# Altium PCB PCB.PcbDoc (part 2 of 2)
Units mil, origin at the board's own origin, x right, y up, seen from the top; angles counter-clockwise.
Board outline 1968.5 x 1220.47 mil, 2 copper layers (Top Layer, Bottom Layer); 78 components, 60 nets, 294 pads, 70 vias.
Unrouted connection lines stored in the file: 2.
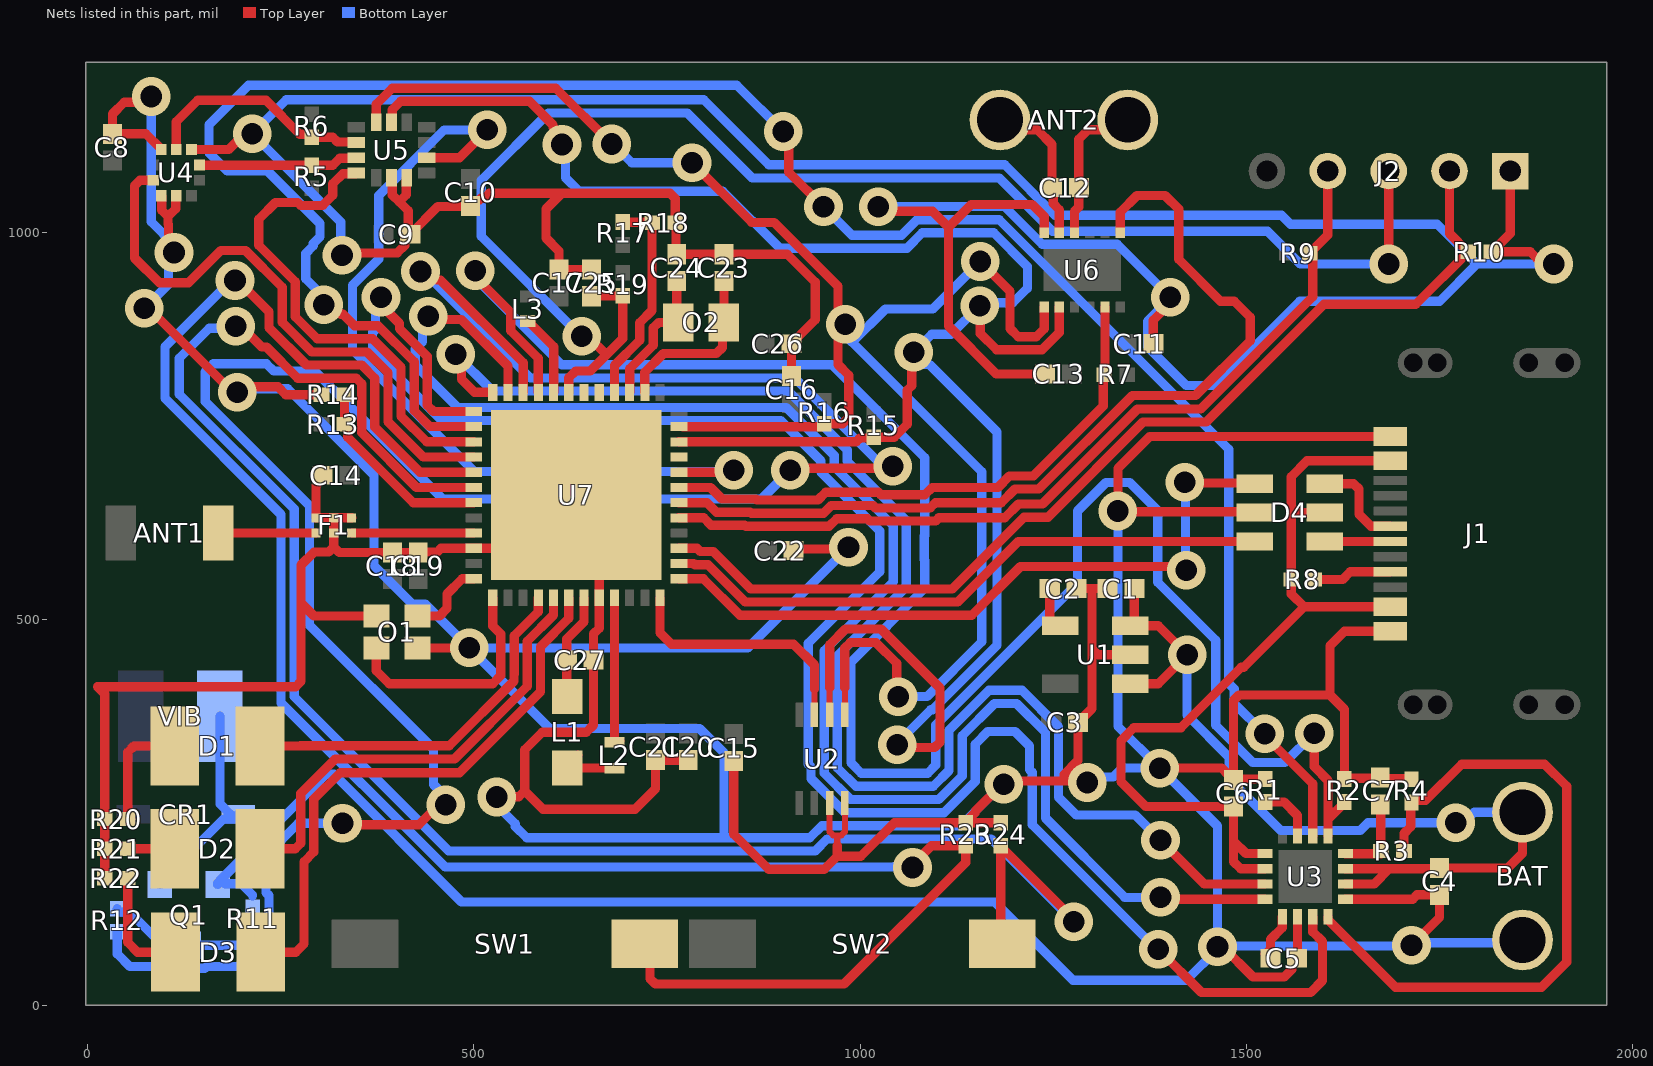
[diagram p2: the nets of this part, all layers, seen from the top]

## Via types
v1: diameter 50, hole 28, Top Layer to Bottom Layer, 70 vias

## Nets (pads, with @x,y where several pads share a name; then routed paths per layer and width w, separated by ;. In a path a pad name is that pad's centre, name@x,y a point inside that pad or via, vN(x,y) a via of type N, cw(c..) or ccw(c..) an arc to the next point about the centre after c; other vN are vias at no path point) (continued)
GND: BAT.2 C1.1 C2.1 C3.1 C4.1 C5.2 C6.2 C7.1 C8.1 C9.1 C10.1 C11.1 C13.2 C14.2 C15.1 C16.2 C17.1 C18.2 C19.1 C20.1 C21.2 C22.1 C23.2 C24.1 C25.1 C26.1 C27.2 D4.2 F1.A2 F1.B1 F1.B2 F1.B3 J1.A1-B12 J1.B1-A12 J2.1 O1.2 O1.4 Q1.2 R1.2 R2.2 R4.2 R10.1 R11.2 R14.2 R18.2 R20.2 R21.2 R22.2 R23.2 R24.2 U1.2 U2.3 U2.4 U3.6 U3.9 U4.3 U4.5 U4.8 U4.9 U5.6 U5.7 U6.6 U7.22 U7.32 U7.49 | length 15944.2
  Top Layer w5: BAT.2@1859.79,54.53 BAT.2@1859.79,70.28
  Top Layer w8: U2.3@960.64,272.61 960.64,224.67 965.32,219.98 970.48,219.98 ; 970.48,206.7 970.48,219.98 ; U2.4@980.34,272.61 980.34,228.37 980.31,224.67 975.63,219.98 970.48,219.98
  Top Layer w12: R22.2@22.5,164.37 R21.2@22.5,202.76 R20.2@22.5,241.14 22.5,402.95 13.05,412.4 269.55,412.4 276.57,419.43 276.57,520.67 ; v1(73.82,902.15) 79.43,902.15 188.28,793.31 v1(193.9,793.31) 201.17,800.58 246.67,800.58 256.89,790.35 R14.2@303.01,790.35 ; v1(82.68,1176.18) 75.41,1168.91 47.85,1168.91 32.48,1153.54 C8.1@32.48,1127.95 75.69,1127.95 95.47,1108.17 U4.5@95.47,1107.68 ; U4.8@95.47,1047.64 96.27,1046.84 96.27,1029.13 104.33,1021.06 ; v1(112.2,974.41) 104.93,981.68 104.93,1010.52 104.33,1011.12 104.33,1021.06 ; U4.9@115.16,1047.64 114.36,1046.84 114.36,1031.09 104.33,1021.06 ; U4.3@134.84,1107.68 183.02,1107.68 203.3,1127.95 v1(213.58,1127.95) ; C14.2@304.53,686.02 303.74,686.02 297.54,679.82 297.54,674.54 295.79,672.79 F1.B1@295.79,630.91 F1.B2@318.9,630.91 ; v1(329.5,970.7) 332.62,973.83 401.23,973.83 410.92,983.52 410.92,991.83 C9.1@417.13,998.03 ; F1.B3@342.01,630.91 F1.B2@318.9,630.91 ; O1.4@374.02,503.94 293.31,503.94 276.57,520.67 ; U5.6@393.7,1070.87 394.59,1069.98 394.59,1048.81 403.54,1039.86 ; U5.7@413.39,1070.87 412.59,1070.07 412.59,1048.91 403.54,1039.86 ; C9.1@415.17,999.99 415.17,1028.24 403.54,1039.86 ; C9.1@417.91,998.03 453.64,1033.76 495.08,1033.76 C10.1@496.06,1034.74 496.06,1035.53 502.27,1041.74 506.64,1041.74 509.3,1044.4 513.24,1044.4 520.02,1051.18 614.17,1051.18 ; O1.2@427.17,462.6 v1(494.09,462.6) ; v1(529.61,269.77) 529.91,270.07 558.45,270.07 565.94,277.56 ; C17.1@610.24,952.36 610.24,976.38 593.5,993.11 593.5,1030.51 614.17,1051.18 ; C17.1@610.73,951.87 652.07,951.87 C25.1@652.56,952.36 ; C20.1@777.56,317.32 C21.2@735.24,317.32 735.24,280.51 708.66,253.94 589.57,253.94 565.94,277.56 ; C15.1@836.61,316.34 836.61,221.46 881.89,176.18 953.74,176.18 970.48,192.92 ; C16.2@911.42,814.57 911.22,814.76 911.22,856.1 C26.1@911.02,856.3 911.81,856.3 918.02,862.5 918.02,863.29 941.93,887.2 941.93,936.02 905.91,972.05 C24.1@762.8,972.05 761.88,972.96 761.88,1011.88 R18.2@760.97,1012.8 760.97,1044.15 753.94,1051.18 614.17,1051.18 ; C22.1@913.98,588.58 916.15,590.75 982.87,590.75 v1(985.03,592.92) ; 970.48,206.7 970.48,192.92 ; v1(1023.62,1033.73) 1029.8,1027.56 1093.73,1027.56 1114.37,1006.92 ; R24.2@1182.09,236.5 R23.2@1136.81,236.5 ; v1(1185.89,286.24) 1183.87,286.24 1149.44,251.8 1149.44,249.97 1136.81,237.35 R23.2@1136.81,236.5 ; v1@1188.07,290.43 1262.71,290.43 ; U6.6@1238.19,1000 1238.19,1020.9 1222.64,1036.45 1143.9,1036.45 1114.37,1006.92 ; C13.2@1239.57,817.16 1176.37,817.16 1114.37,879.16 1114.37,1006.92 ; C2.1@1280.12,539.37 1300.2,539.37 ; v1(1293.89,288.39) 1291.84,290.43 1263.78,290.43 1263.78,298.67 1282.09,316.98 C3.1@1282.09,366.14 1282.87,366.14 1289.08,372.35 1289.08,373.13 1300.2,384.25 1300.2,461.61 ; C1.1@1320.28,539.37 1300.2,539.37 ; U1.2@1349.41,453.74 1308.07,453.74 1300.2,461.61 ; C11.1@1379.53,856.53 1379.53,886.73 1401.57,908.78 v1(1401.57,916.34) ; v1(1387.8,307.09) 1468.11,307.09 1476.28,298.92 1477.06,298.92 C6.2@1483.27,292.72 ; v1(1462.6,75.79) 1469.49,75.79 1508.46,36.82 1548.87,36.82 1558.56,46.51 1558.56,54.82 1564.76,61.02 C5.2@1565.55,61.02 1566.1,61.58 1566.1,114.67 U3.6@1566.2,114.76 ; C6.2@1494.09,292.03 1483.37,292.03 1483.37,394.55 1490.4,401.57 1608.27,401.57 ; C6.2@1494.09,293.05 R1.2@1524.47,293.05 ; D4.2@1510.83,637.8 1509.84,638.78 1334.65,638.78 v1(1333.66,639.76) 1333.66,694.88 1375.02,736.24 J1.B1-A12@1686,736.24 ; U3.9@1628.21,137.4 1715.16,137.4 1720.87,143.11 C4.1@1750,143.11 1750,114.17 v1(1713.58,77.76) ; J1.A1-B12@1686,484.24 1626.95,484.24 1608.27,465.55 1608.27,401.57 ; R4.2@1713.58,292.46 1712.37,293.67 1674.44,293.67 C7.1@1673.23,294.88 1672.31,293.97 1627.74,293.97 1626.83,294.88 1626.83,383.01 1608.27,401.57 ; J2.1@1841.54,1079.72 1841.54,999.02 1817.91,975.39 1867.21,975.39 v1@1875.83,966.78 ; BAT.2@1864.67,92.03 BAT.2@1873.03,83.66 ; 276.57,520.67 276.57,569.88 293.31,586.61 312.01,586.61 318.9,593.5 ; 318.9,593.5 326.18,586.22 C18.2@394.68,586.22 C19.1@428.15,586.22 428.54,586.61 452.76,586.61 457.68,591.54 U7.22@500,591.54 563.98,591.54 U7.49@632.87,660.43 662.4,630.91 U7.32@662.4,527.56 662.4,488.19 655.12,480.91 C27.2@655.12,446.85 655.12,362.8 645.67,353.35 588.58,353.35 565.94,330.71 565.94,277.56 ; 318.9,593.5 F1.A2@318.9,611.22 F1.B2@318.9,630.91 ; 970.48,192.92 1000.99,192.92 1044.57,236.5 R23.2@1136.81,236.5 ; 1300.2,461.61 1300.2,539.37
  Bottom Layer w12: v1(73.82,902.15) 104.93,933.27 104.93,967.14 v1(112.2,974.41) 112.2,984.65 82.68,1014.18 v1(82.68,1176.18) ; Q1.2@168.59,156.5 168.59,158.46 172.97,162.85 309.15,299.02 319.09,299.02 484.25,133.86 1174.21,133.86 1275.59,32.48 1422.24,32.48 1462.6,72.83 v1(1462.6,75.79) ; Q1.2@173.96,161.86 178.34,157.48 199.1,157.48 213.87,142.72 213.87,141.87 ; v1(193.9,793.31) 198.44,797.85 259.24,797.85 371.06,686.02 371.06,568.9 420.58,519.38 437.31,519.38 v1(494.09,462.6) ; v1(329.5,970.7) 327.83,972.36 327.83,1013.7 v1(213.58,1127.95) 257.53,1171.9 797.59,1171.9 881.76,1087.73 1187.29,1087.73 1252.39,1022.64 1545.28,1022.64 1557.09,1010.83 1746.77,1010.83 1798.09,959.51 ; v1(529.61,269.77) 529.61,259.48 553.85,235.24 553.85,231.58 568.63,216.8 823.83,216.8 ; v1(985.03,592.92) 854.71,462.6 v1(494.09,462.6) ; v1(1023.62,1033.73) 1187.16,1033.73 1235.92,984.97 1332.94,984.97 v1(1401.57,916.34) 1401.57,914.58 1372.05,885.05 1372.05,852.36 1422.24,802.17 1459.65,802.17 1568.9,911.42 1750,911.42 1798.09,959.51 ; v1(1185.89,286.24) 1183.87,286.24 1130.1,232.46 950.6,232.46 934.94,216.8 823.83,216.8 ; v1(1293.89,288.39) 1301.16,295.66 1327.79,295.66 1339.22,307.09 v1(1387.8,307.09) ; v1(1333.66,639.76) 1333.66,361.22 v1(1387.8,307.09) ; BAT.2@1857.28,84.65 1853.84,81.2 1717.03,81.2 v1(1713.58,77.76) 1712.6,76.77 1463.58,76.77 v1(1462.6,75.79) ; v1(1897.64,959.51) 1798.09,959.51 ; v1(494.09,462.6) 598.43,358.27 792.32,358.27 823.83,326.76 823.83,216.8 ; v1(1387.8,307.09) 1462.6,232.28 v1(1462.6,75.79)
NetANT1_1: ANT1.1 F1.A1 | length 126.5
  Top Layer w12: ANT1.1@169.29,611.22 F1.A1@295.79,611.22
NetANT2_1: ANT2.1 C12.1 U6.4 | length 196.9
  Top Layer w12: U6.4@1277.56,1000 1277.56,1027.79 1283.07,1033.3 C12.1@1283.07,1058.3 1283.07,1120.9 1295.3,1133.13 1333.69,1133.13 ANT2.1@1346.46,1145.9
NetANT2_2: ANT2.2 C12.2 U6.5 | length 198.5
  Top Layer w12: ANT2.2@1181.1,1145.9 1193.87,1133.13 1229.31,1133.13 1248.43,1114.01 C12.2@1248.43,1058.3 1250,1056.72 1250,1037.63 1257.87,1029.76 U6.5@1257.87,1000
NetC2_2: C2.2 U1.4 | length 58.2
  Top Layer w12: C2.2@1245.47,539.37 1245.47,496.95 1251.28,491.14 U1.4@1258.86,491.14
NetC5_1: C5.1 U3.5 | length 57.9
  Top Layer w12: C5.1@1524.27,66.54 1525.06,66.54 1531.26,72.74 1531.26,85.4 1546.42,100.55 1546.42,114.67 U3.5@1546.51,114.76
NetC7_2: C7.2 R3.1 U3.12 | length 106.6
  Top Layer w12: U3.12@1628.21,196.46 1628.3,196.36 R3.1@1674.03,196.36 ; C7.2@1673.23,260.24 1673.65,259.81 1673.65,200.23 R3.1@1674.07,199.8
NetC23_1: C23.1 O2.1 U7.2 | length 219.9
  Top Layer w12: U7.2@721.46,793.31 721.46,819.46 745.5,843.5 813.98,843.5 821.85,851.38 O2.1@821.85,877.95 ; O2.1@823.82,883.86 C23.1@823.82,937.4
NetC24_2: C24.2 O2.2 U7.3 | length 202
  Top Layer w10: O2.2@764.76,883.86 O2.2@778.94,898.03
  Top Layer w12: U7.3@701.77,793.31 701.77,823.82 732.28,854.33 732.28,876.83 739.31,883.86 O2.2@760.83,883.86 ; C24.2@762.8,937.4 762.8,885.83 O2.2@764.76,883.86
NetC25_2: C25.2 J2.3 R19.1 U7.7 | length 1913.3
  Top Layer w12: U7.7@623.03,793.31 623.13,793.4 623.13,812.1 631.89,820.87 650.74,820.87 671.82,841.95 ; v1(639.76,866.14) 647.64,866.14 671.82,841.95 ; C25.2@652.56,916.93 653.57,917.94 690.72,917.94 R19.1@690.94,918.17 ; R19.1@692.91,918.17 692.91,863.04 671.82,841.95 ; v1(1684.06,959.51) J2.3@1684.06,1079.72
  Bottom Layer w12: v1(639.76,866.14) 638.94,866.14 509.84,995.24 509.84,1067.91 596.83,1154.9 776.2,1154.9 860.37,1070.73 1180.25,1070.73 1249.02,1001.97 1527.27,1001.97 1569.73,959.51 v1(1684.06,959.51)
NetC27_1: C27.1 L1.2 U7.31 | length 153.6
  Top Layer w10: L1.2@621.06,399.61 L1.2@632.48,411.02
  Top Layer w12: L1.2@621.06,399.61 620.47,400.2 C27.1@620.47,446.85 620.47,474.26 642.72,496.51 U7.31@642.72,527.56
NetCR1_2: CR1.2 Q1.1 VIB.1 | length 272.7
  Bottom Layer w12: Q1.1@93.79,156.5 93.79,158.46 176.68,241.36 189.34,241.36 CR1.2@195.17,247.19 ; VIB.1@171.54,374.16 171.54,260.76 CR1.2@185.12,247.19
NetD1_1: D1.1 R20.1 | length 150.7
  Top Layer w12: R20.1@52.31,241.14 52.31,327.62 60.32,335.63 D1.1@113.19,335.63
NetD1_2: D1.2 U7.28 | length 484.4
  Top Layer w12: D1.2@223.43,335.63 275.31,335.63 275.58,335.9 468.21,335.9 552.17,419.86 552.17,428.15 552.43,428.42 552.43,478.35 583.57,509.48 583.57,527.46 U7.28@583.66,527.56
NetD2_1: D2.1 R21.1 | length 60.9
  Top Layer w12: R21.1@52.31,202.76 D2.1@113.19,202.76
NetD2_2: D2.2 U7.29 | length 599.4
  Top Layer w12: D2.2@223.43,202.76 269.11,202.76 276.14,209.79 276.14,274.17 320.87,318.9 475.25,318.9 569.43,413.08 569.43,471.3 603.25,505.12 603.25,527.46 U7.29@603.35,527.56
NetD3_1: D3.1 R22.1 | length 149.9
  Top Layer w12: R22.1@52.31,164.37 52.31,81.55 64.96,68.9 D3.1@114.17,68.9
NetD3_2: D3.2 U7.30 | length 740.7
  Top Layer w12: D3.2@224.41,68.9 269.68,68.9 280.51,79.72 280.51,186.02 293.14,198.65 293.14,267.13 327.19,301.18 481.57,301.18 586.43,406.04 586.43,464.26 623.03,500.86 U7.30@623.03,527.56
NetD4_1: D4.1 U7.37 | length 910.6
  Top Layer w12: U7.37@765.75,552.17 797.24,552.17 844.49,504.92 1144.69,504.92 1207.68,567.91 1417.32,567.91 v1(1422.24,562.99) ; v1(1420.28,677.17) 1421.26,676.18 1509.84,676.18 D4.1@1510.83,675.2
  Bottom Layer w12: v1(1420.28,677.17) 1421.26,676.18 1421.26,563.98 v1(1422.24,562.99)
NetD4_3: D4.3 U7.38 | length 798.3
  Top Layer w12: U7.38@765.75,571.85 765.84,571.76 784.66,571.76 786.08,570.33 803.12,570.33 851.53,521.92 1126.25,521.92 1204.72,600.39 D4.3@1510.83,600.39
NetD4_4: D4.4 J1.A6 | length 84.7
  Top Layer w5: D4.4@1601.38,600.39 D4.4@1601.38,600.39
  Top Layer w12: D4.4@1601.38,600.39 1670.46,600.39 1670.5,600.44 J1.A6@1686,600.44
NetD4_6: D4.6 J1.A7 | length 126.5
  Top Layer w12: D4.6@1601.38,675.2 1638.64,675.2 1645.67,668.17 1645.67,635.7 1661.23,620.14 J1.A7@1686,620.14
NetF1_A3: F1.A3 U7.21 | length 158
  Top Layer w12: F1.A3@342.01,611.22 U7.21@500,611.22
NetJ1_A5: J1.A5 R8.2 | length 102.3
  Top Layer w12: R8.2@1587.74,551.18 1624.62,551.18 1634.47,561.04 J1.A5@1686,561.04
NetJ2_2: J2.2 R10.2 U7.39 | length 1338.2
  Top Layer w12: U7.39@765.75,591.54 788.92,591.54 793.12,587.33 810.16,587.33 858.57,538.92 1119.21,538.92 1212.18,631.89 1243.11,631.89 1366.14,754.92 1447.83,754.92 1600.25,907.34 1719.21,907.34 R10.2@1787.26,975.39 ; J2.2@1762.8,1079.72 1762.8,999.02 R10.2@1786.42,975.39
NetJ2_4: J2.4 R9.2 U7.41 | length 1121
  Top Layer w12: U7.41@765.75,630.91 797.63,630.91 807.21,621.33 850.81,621.33 852.19,619.94 959.73,619.94 969.71,629.92 1009.67,629.92 1012.75,626.83 1097.92,626.83 1101.99,630.91 1187.15,630.91 1205.14,648.89 1236.07,648.89 1359.1,771.92 1440.79,771.92 1585.98,917.11 1585.98,977.57 1605.31,996.91 J2.4@1605.31,1079.72
NetL1_1: L1.1 L2.1 | length 83.3
  Top Layer w10: L1.1@621.06,307.09 L1.1@625.98,312.01
  Top Layer w12: L1.1@621.06,307.09 L2.1@682.09,307.09 ; L1.1@625.98,312.01 625.98,314.96 L1.1@634.75,323.72
NetL2_2: L2.2 U7.33 | length 195.6
  Top Layer w10: L2.2@682.09,340.55 687.99,340.55 L2.2@689.88,342.44
  Top Layer w12: L2.2@682.09,340.55 U7.33@682.09,527.56
NetL3_2: L3.2 U7.8 | length 107.6
  Top Layer w12: L3.2@569.88,885.83 571.85,885.83 573.72,883.95 573.72,881.98 603.44,852.27 603.44,793.4 U7.8@603.35,793.31
NetO1_1: O1.1 U7.25 | length 307
  Top Layer w12: O1.1@374.02,462.6 374.02,433.07 390.75,416.34 524.61,416.34 535.17,426.9 535.17,480.58 524.7,491.05 524.7,527.46 U7.25@524.61,527.56
NetO1_3: O1.3 U7.24 | length 103.8
  Top Layer w12: O1.3@427.17,503.94 455.71,503.94 465.55,513.78 465.55,532.48 485.24,552.17 U7.24@500,552.17
NetQ1_3: Q1.3 R11.1 R12.1 | length 204.5
  Bottom Layer w12: R12.1@38.67,125.14 38.67,124.3 41.97,121 54.2,121 97.44,77.76 Q1.3@131.19,77.76 197.13,77.76 210.57,91.19 210.57,93.02 212.9,95.35 R11.1@214.73,95.35
NetR1_1: R1.1 U3.15 | length 76.9
  Top Layer w5: R1.1@1524.47,263.25 R1.1@1525.31,262.4
  Top Layer w12: R1.1@1524.47,263.25 1548.76,263.25 1566.2,245.81 U3.15@1566.2,219.09
NetR2_1: R2.1 U3.13 U7.9 | length 2618
  Top Layer w12: v1(501.97,950.79) 501.97,942.91 548.04,896.84 548.04,872.98 583.66,837.36 U7.9@583.66,793.31 ; v1(1587.6,352.36) 1587.6,309.03 1605.53,291.11 1605.53,239.66 1605.66,239.52 ; U3.13@1605.57,219.09 1605.66,219.19 1605.66,239.52 ; R2.1@1626.83,263.25 1626.83,262.4 1606.3,241.87 1606.3,240.16 1605.66,239.52
  Bottom Layer w12: v1(501.97,950.79) 501.97,940.94 613.91,829.01 963.32,829.01 1083.66,708.66 1083.66,608.02 1083.08,607.44 1083.08,576.79 1083.66,576.21 1083.66,539.66 988.19,444.19 988.19,313.98 1001.7,300.46 1087.55,300.46 1098.07,310.98 1098.07,362.98 1281.5,546.4 1281.5,639.92 1318.34,676.76 1348.99,676.76 1385.24,640.51 1385.24,547.67 1460.23,472.68 1460.23,362.45 1508.3,314.38 1549.61,314.38 v1(1587.6,352.36)
NetR3_2: R3.2 R4.1 U3.8 | length 889.5
  Top Layer w12: U3.8@1605.57,114.76 1605.57,111.02 1692.96,23.62 1881.89,23.62 1914.37,56.1 1914.37,283.46 1885.83,312.01 1778.54,312.01 1731.84,265.3 1716.23,265.3 1712.6,261.67 1712.6,231.3 1703.88,222.58 R3.2@1703.88,199.8
NetR5_1: R5.1 U4.2 U5.3 | length 206.9
  Top Layer w12: U4.2@145.18,1087.5 145.3,1087.37 290.23,1087.37 R5.1@290.35,1087.25 317.65,1087.25 326.56,1096.15 347.14,1096.15 U5.3@347.93,1096.95
NetR6_1: R6.1 U4.4 U5.2 | length 303.3
  Top Layer w12: U4.4@115.16,1107.68 115.16,1143.7 142.72,1171.26 231.3,1171.26 275.03,1127.53 287.05,1127.53 290.35,1124.23 R6.1@290.35,1123.38 317.65,1123.38 323.61,1117.43 347.14,1117.43 U5.2@347.93,1116.63
NetR7_2: R7.2 U6.11 U7.43 | length 738
  Top Layer w12: U7.43@765.75,670.28 806.34,670.28 821.29,655.33 864.89,655.33 866.28,653.94 945.65,653.94 955.63,663.92 1023.75,663.92 1026.84,660.83 1083.83,660.83 1093.28,670.28 1178.44,670.28 1193.4,685.23 1224.33,685.23 1314.82,775.73 1314.82,815.19 R7.2@1315.8,816.17 1316.93,817.3 U6.11@1316.93,904
NetR12_2: R12.2 U7.10 | length 3233
  Top Layer w12: v1(330.14,235.65) 331.93,233.85 428.73,233.85 454.72,259.84 v1(463.58,259.84) ; v1(431.1,949.8) 441.39,949.8 452.41,938.78 456.89,938.78 563.98,831.69 U7.10@563.98,793.31 ; v1(909.45,692.33) 912.2,695.08 1039.41,695.08 v1(1042.16,697.83)
  Bottom Layer w12: R12.2@38.67,95.33 38.67,66.65 55.12,50.2 108.31,50.2 110.47,48.04 151.91,48.04 154.07,50.2 194.88,50.2 214.57,69.88 228.14,69.88 235.17,76.91 235.17,142.08 231.3,145.95 231.3,193.9 273.05,235.65 v1(330.14,235.65) ; v1(431.1,949.8) 435.2,949.8 573,812.01 915.35,812.01 1029.53,697.83 v1(1042.16,697.83) ; v1(463.58,259.84) 463.58,270.12 447.83,285.87 447.83,331.69 287.4,492.13 287.4,646.65 152.56,781.5 152.56,819.88 162.98,830.31 231.71,830.31 241.15,820.87 294.29,820.87 459.83,655.33 872.45,655.33 v1(909.45,692.33)
NetR13_1: R13.1 R14.1 U7.19 | length 255.4
  Top Layer w12: R14.1@332.82,790.35 R13.1@332.82,751.97 333.66,751.97 336.96,748.67 336.96,735.32 421.7,650.59 U7.19@500,650.59
NetR15_1: R15.1 U2.6 U5.13 U6.8 U7.46 | length 2808.1
  Top Layer w8: U2.6@960.66,375.98 960.63,411.42
  Top Layer w12: U5.13@393.7,1142.72 394.5,1143.51 394.5,1159.01 405.5,1170.01 572.12,1170.01 602.66,1139.47 602.66,1135.97 614.17,1124.46 v1(614.17,1114.17) ; U7.46@765.75,729.33 995.08,729.33 1000,734.25 R15.1@1016.73,734.25 ; 960.63,411.42 960.63,466.79 981.04,487.2 1026.99,487.2 1103.35,410.85 1103.35,340.69 1096.32,333.66 1052.03,333.66 v1(1048.23,337.46) ; R15.1@1017.72,735.1 1044.15,735.1 1061.02,751.97 1061.02,796.06 1067.02,802.06 1067.02,842.61 v1(1069.47,845.06) ; v1(1154.72,905.54) 1155.57,904.69 1155.57,869.58 1176.7,848.46 1235.43,848.46 1257.87,870.9 U6.8@1257.87,904
  Bottom Layer w12: v1(614.17,1114.17) 618.79,1109.56 618.79,1071.17 636.41,1053.55 822.43,1053.55 896.25,979.73 1060.6,979.73 1080.6,999.73 1173.08,999.73 1216.54,956.27 1216.54,928.15 1197.72,909.34 1158.52,909.34 v1(1154.72,905.54) 1117.69,868.51 1092.92,868.51 1061.02,836.61 1068.29,829.34 1089.95,829.34 1177.17,742.13 1177.17,466.12 1093.66,382.61 1091.55,382.61 1048.23,339.29 v1(1048.23,337.46)
NetR16_1: R16.1 U2.5 U5.14 U6.7 U7.47 | length 2380.4
  Top Layer w8: 980.32,411.42 980.36,411.37 U2.5@980.36,375.98
  Top Layer w12: U5.14@374.02,1142.72 374.02,1166.34 394.68,1187.01 606.3,1187.01 v1(678.56,1114.75) ; U7.47@765.75,749.02 770.48,749.02 770.62,748.88 950.44,748.88 953.74,752.18 R16.1@953.74,752.81 977.22,752.81 985.24,760.83 985.24,815.5 971.46,829.28 971.46,839.57 971.46,847.94 v1@971.46,867.21 ; v1(782.48,1090.55) 859.72,1013.31 888.69,1013.31 971.46,930.54 v1@971.46,867.21 ; 980.32,411.42 980.32,462.44 987.37,469.49 1020.67,469.49 1047.55,442.61 1047.55,401.27 v1(1049.21,399.61) ; v1(980.72,881.53) 971.46,872.27 v1@971.46,867.21 ; v1(1155.71,962.73) 1194.09,924.35 1194.09,876.02 1204.65,865.46 1227.83,865.46 1238.19,875.82 U6.7@1238.19,904
  Bottom Layer w12: v1(678.56,1114.75) 680.4,1114.75 704.59,1090.55 v1(782.48,1090.55) ; v1(980.72,881.53) 987.99,874.26 987.99,859.93 989.91,858.02 ; v1(1049.21,399.61) 1086.61,399.61 1157.48,470.47 1157.48,690.44 989.91,858.02 ; v1(1155.71,962.73) 1094.13,901.15 1033.04,901.15 989.91,858.02
NetR17_1: R17.1 R18.1 U7.4 | length 275.9
  Top Layer w12: U7.4@682.09,793.31 682.09,828.18 714.85,860.94 714.85,883.44 730.67,899.25 R18.1@730.67,1010.34 ; R17.1@692.91,1013.92 693.48,1013.36 730.6,1013.36 R18.1@731.16,1012.8
NetR23_1: R23.1 SW1.2 U7.17 | length 2645.4
  Top Layer w12: v1(191.07,938.11) 194.76,938.11 235.1,897.77 235.1,877.09 283.53,828.65 324.61,828.65 354.97,828.65 371.96,811.67 371.96,781.31 371.96,748.41 430.41,689.96 U7.17@500,689.96 ; SW1.2@721.26,79.72 728.21,72.78 728.21,34.59 735.24,27.56 979.33,27.56 1136.81,185.04 R23.1@1136.81,206.69 1092.34,206.69 1067.91,182.27 v1(1067.91,178.46)
  Bottom Layer w12: v1(191.07,938.11) 186.15,938.11 100.39,852.36 100.39,785.58 250.72,635.26 250.72,391.44 463.02,179.13 1042.87,179.13 1043.47,179.74 1066.64,179.74 v1(1067.91,178.46)
NetR24_1: R24.1 SW2.2 U7.18 | length 2428.8
  Top Layer w12: v1(191.93,878.94) 198.79,878.94 225.76,851.96 231.86,851.96 272.17,811.65 347.93,811.65 354.96,804.63 354.96,741.37 426.05,670.28 U7.18@500,670.28 ; SW2.2@1183.86,79.72 1182.09,81.5 R24.1@1182.09,206.69 1182.09,205.85 1276.57,111.36 v1(1276.57,108.27)
  Bottom Layer w12: v1(191.93,878.94) 189.27,876.28 157.78,876.28 119.09,837.6 119.09,790.92 267.72,642.3 267.72,399.61 467.52,199.8 941.98,199.8 957.65,215.46 1169.38,215.46 v1(1276.57,108.27)
NetU2_7: U2.7 U7.36 | length 326.9
  Top Layer w8: U2.7@940.96,375.98 940.96,409.43
  Top Layer w12: U7.36@741.14,527.56 741.14,482.28 755.91,467.52 913.95,467.52 940.94,440.53 940.94,409.45
NetU3_3: U3.3 U7.12 | length 1922.7
  Top Layer w12: v1(476.87,842.43) 484.14,835.16 484.14,810.15 500.98,793.31 U7.12@524.61,793.31 ; v1(1388.78,213.58) 1445.28,157.09 U3.3@1523.88,157.09
  Bottom Layer w12: v1(476.87,842.43) 524.29,795.01 907.18,795.01 983.48,718.71 983.48,704.19 1059.77,627.9 1059.77,541.34 970.47,452.04 970.47,307.65 994.66,283.46 1094.59,283.46 1115.07,303.94 1115.07,355.94 1166.88,407.75 1209.51,407.75 1256.89,360.37 1256.89,269.39 1279.86,246.42 1355.94,246.42 v1(1388.78,213.58)
NetU3_4: U3.4 U7.11 | length 2140.8
  Top Layer w12: v1(440.94,891.73) 444.99,887.68 483.94,887.68 544.29,827.34 U7.11@544.29,793.31 ; v1(1388.78,139.76) 1391.05,137.5 1523.78,137.5 U3.4@1523.88,137.4
  Bottom Layer w12: v1(440.94,891.73) 433.67,884.46 433.67,858.87 424.21,849.41 424.21,828.74 479.06,773.89 904.26,773.89 966.48,711.67 966.48,697.15 1042.77,620.86 1042.77,548.38 953.47,459.08 953.47,300.61 987.62,266.46 1101.64,266.46 1132.07,296.9 1132.07,348.9 1173.92,390.75 1202.47,390.75 1239.89,353.32 1239.89,242.39 1342.52,139.76 v1(1388.78,139.76)
NetU3_7: U3.7 U7.13 | length 2467.8
  Top Layer w12: v1(380.1,916.65) 380.1,906.37 403.94,882.53 403.94,875.85 439.96,839.83 439.96,776.57 447.83,768.7 U7.13@500,768.7 ; v1(1385.83,72.83) 1441.93,16.73 1583.05,16.73 1598.43,32.1 1598.43,82.68 1585.98,95.12 1585.98,114.67 U3.7@1585.88,114.76
  Bottom Layer w12: v1(380.1,916.65) 372.83,909.38 372.83,874.65 369.09,870.91 369.09,846.46 458.66,756.89 897.22,756.89 949.48,704.63 949.48,690.11 1025.59,614 1025.59,561.02 933.07,468.5 933.07,312.01 936.47,308.61 936.47,293.57 980.58,249.46 1108.68,249.46 1149.07,289.86 1149.07,338.05 1165.35,354.33 1200.52,354.33 1219.22,335.63 1219.22,305.23 1222.89,301.56 1222.89,233.8 1383.86,72.83 v1(1385.83,72.83)
NetU3_14: U3.14 U7.14 | length 2761.9
  Top Layer w12: v1(306.1,906.5) 316.39,906.5 328.39,894.49 330.91,894.49 345.74,879.65 376.1,879.65 422.96,832.79 422.96,769.53 443.48,749.02 U7.14@500,749.02 ; v1(900.59,1130.91) 907.86,1123.63 907.86,1078.36 v1(952.76,1033.46) ; v1(1523.62,351.38) 1523.62,348.97 1585.88,286.71 U3.14@1585.88,219.09
  Bottom Layer w12: v1(306.1,906.5) 306.1,916.78 282.48,940.4 282.48,973.11 292.5,983.12 292.5,986.03 301.18,994.71 301.18,1011.81 233.27,1079.72 181.1,1079.72 157.48,1103.35 157.48,1139.76 208.66,1190.94 840.55,1190.94 v1(900.59,1130.91) ; v1(952.76,1033.46) 989.49,996.73 1053.56,996.73 1073.56,1016.73 1180.12,1016.73 1477.23,719.62 1477.23,416.47 1484.25,409.45 1484.25,390.75 v1(1523.62,351.38)
NetU4_7: U4.7 U7.16 | length 764.5
  Top Layer w12: U4.7@85.14,1067.81 68.05,1067.81 61.02,1060.79 61.02,967.28 93.26,935.04 130.91,935.04 172.83,976.96 204.55,976.96 252.1,929.4 252.1,884.13 290.58,845.65 331.66,845.65 362.02,845.65 388.96,818.71 388.96,788.35 388.96,755.45 434.76,709.65 U7.16@500,709.65
NetU5_4: U5.4 U7.15 | length 643.4
  Top Layer w12: U5.4@347.93,1077.26 347.04,1076.37 330.82,1076.37 317.67,1063.22 317.67,1048.34 304.63,1035.29 276.08,1035.29 272.41,1038.97 243.53,1038.97 221.86,1017.29 221.86,983.69 269.1,936.45 269.1,891.17 297.62,862.65 338.7,862.65 369.06,862.65 405.96,825.75 405.96,795.39 405.96,762.49 439.12,729.33 U7.15@500,729.33
NetU5_9: U5.9 U7.44 | length 1114.1
  Top Layer w12: U5.9@439.47,1096.95 481.66,1096.95 v1(517.72,1133.01) ; U7.44@765.75,689.96 765.84,690.06 834.34,690.06 v1(836.61,692.33)
  Bottom Layer w12: v1(517.72,1133.01) 461.75,1133.01 376.97,1048.23 376.97,965.85 343.1,931.98 343.1,848.41 500.56,690.94 835.23,690.94 v1(836.61,692.33)
NetU6_1: U6.1 U7.42 | length 1177.7
  Top Layer w12: U7.42@765.75,650.59 801.99,650.59 814.25,638.33 857.85,638.33 859.24,636.94 952.69,636.94 962.67,646.92 1016.71,646.92 1019.79,643.83 1090.88,643.83 1097.63,650.59 1182.8,650.59 1200.44,668.23 1231.37,668.23 1352.51,789.37 1434.2,789.37 1504.99,860.16 1504.99,890.68 1484.25,911.42 1466.54,911.42 1412.4,965.55 1412.4,1030.51 1394.68,1048.23 1358.27,1048.23 1336.61,1026.57 U6.1@1336.61,1000
NetU7_5: U7.5
NetU7_6: U7.6
NetU7_45: U7.45
VBAT: BAT.1 C1.2 C4.2 U1.1 U1.3 U3.10 U3.11 | length 1176.4
  Top Layer w12: U1.1@1349.41,416.34 1385.83,416.34 v1(1423.23,453.74) 1385.83,491.14 U1.3@1349.41,491.14 1354.92,496.65 C1.2@1354.92,539.37 ; U3.10@1628.21,157.09 1665.33,157.09 1685.02,176.77 ; U3.11@1628.21,176.77 1685.02,176.77 ; C4.2@1741.83,176.77 1685.02,176.77 ; C4.2@1750,177.76 1838.19,177.76 1857.28,196.85 BAT.1@1857.28,250
  Bottom Layer w12: v1(1423.23,453.74) 1423.23,375.4 1477.36,321.27 1477.36,293.31 1544.29,226.38 1647.42,226.38 1657.26,236.22 v1(1770.67,236.22) 1780.95,236.22 1794.73,250 BAT.1@1857.28,250
VUSB: C6.1 D4.5 J1.A4-B9 J1.B4-A9 R8.1 U3.1 U3.2 | length 1156.4
  Top Layer w5: U3.2@1520.47,180.18 U3.2@1523.88,176.77
  Top Layer w12: U3.2@1523.88,176.77 1492.52,176.77 1483.27,186.02 1483.27,212.6 ; U3.1@1523.88,196.46 1499.41,196.46 1483.27,212.6 ; R8.1@1557.93,551.18 1558.07,551.04 1558.07,532.48 1574.81,515.74 ; R8.1@1558.07,553.01 1558.07,644.82 ; D4.5@1601.38,637.8 1565.1,637.8 1559.9,643 1558.07,644.82 ; J1.A4-B9@1686,515.74 1574.81,515.74 ; J1.B4-A9@1686,704.74 1578.51,704.74 1558.07,684.29 1558.07,644.82 ; 1483.27,212.6 C6.1@1483.27,257.28 1369.68,257.28 1337.6,289.37 1337.6,342.52 1354.33,359.25 1415.18,359.25 1493.42,437.49 1496.57,437.49 1574.81,515.74
pads on no net: ANT1.2 J1.13 J1.14 J1.15 J1.16 J1.A8 J1.B5 J1.B6 J1.B7 J1.B8 J1.S_1_H1 J1.S_1_H2 J1.S_2_H1 J1.S_2_H2 J1.S_3_H1 J1.S_3_H2 J1.S_4_H1 J1.S_4_H2 U3.16 U3.17 U5.10 U5.11 U6.2 U6.3 U6.9 U6.13 U7.26 U7.27

## Polygon pours and split planes (outlines as drawn)
GND on Bottom Layer "GND_L02_P001" (solid, pour order 1): -1.97,0 -0.98,0.98 1966.54,0.98 1966.54,1218.5 1964.57,1220.47 1963.58,1219.49 -1.97,1219.49 -1.97,704.72 262.8,704.72 262.8,421.26 -2.95,421.26 -2.95,1.97 -1.97,0.98
GND on Top Layer "GND_L01_P002" (solid, pour order 2): 0.98,0.98 1.97,0 1967.52,0 1967.52,1217.52 1966.54,1218.5 -2.95,1218.5 -2.95,705.71 -1.97,704.72 262.8,704.72 262.8,424.21 261.81,423.23 -3.94,423.23 -3.94,0 -2.95,-0.98

## Silkscreen, mask and mechanical layers (free items; w line width, h text height)
Mechanical 1:
  the board outline again, w10

## Text inside footprints (layer, text, board x,y; h text height)
CR1: Mechanical 13 "*" at 68.65,272.19 h50 r180; Bottom Overlay "*" at 9.96,272.19 h50 r180
J1: Top Overlay "*" at 1711,371.74 h50 r90; Mechanical 13 "*" at 1711,371.74 h50 r90